# Altium PCB Chicken_Coop_Door_Motor_Control_Board_V2.PcbDoc
Units mm, origin at the board's own origin, x right, y up, seen from the top; angles counter-clockwise.
Board outline 59.87 x 53.07 mm, 2 copper layers (Top Layer, Bottom Layer), stack 1.549 mm thick; 51 components, 35 nets, 157 pads, 47 vias.
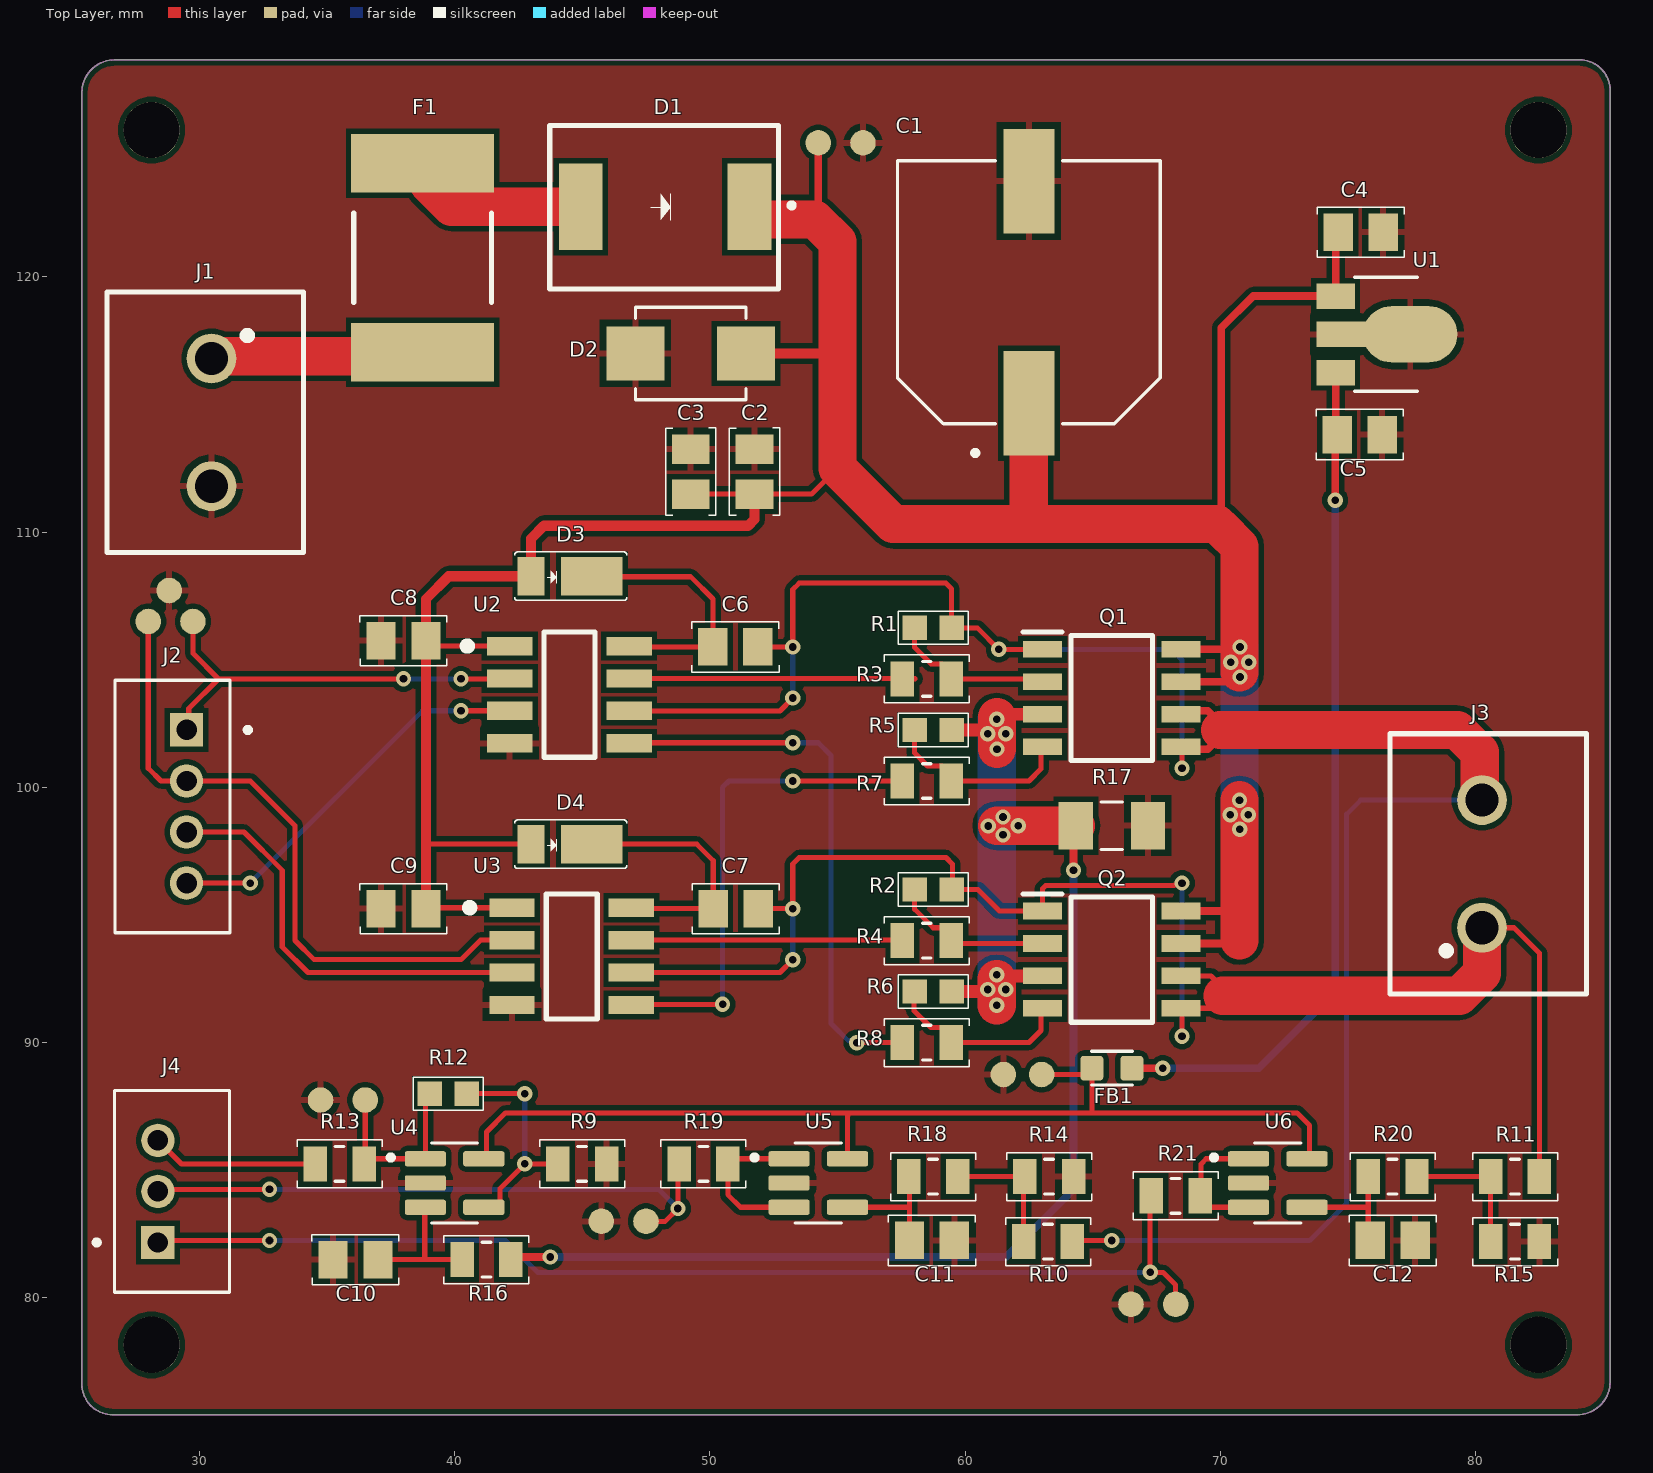
[diagram p0: Top Layer view]
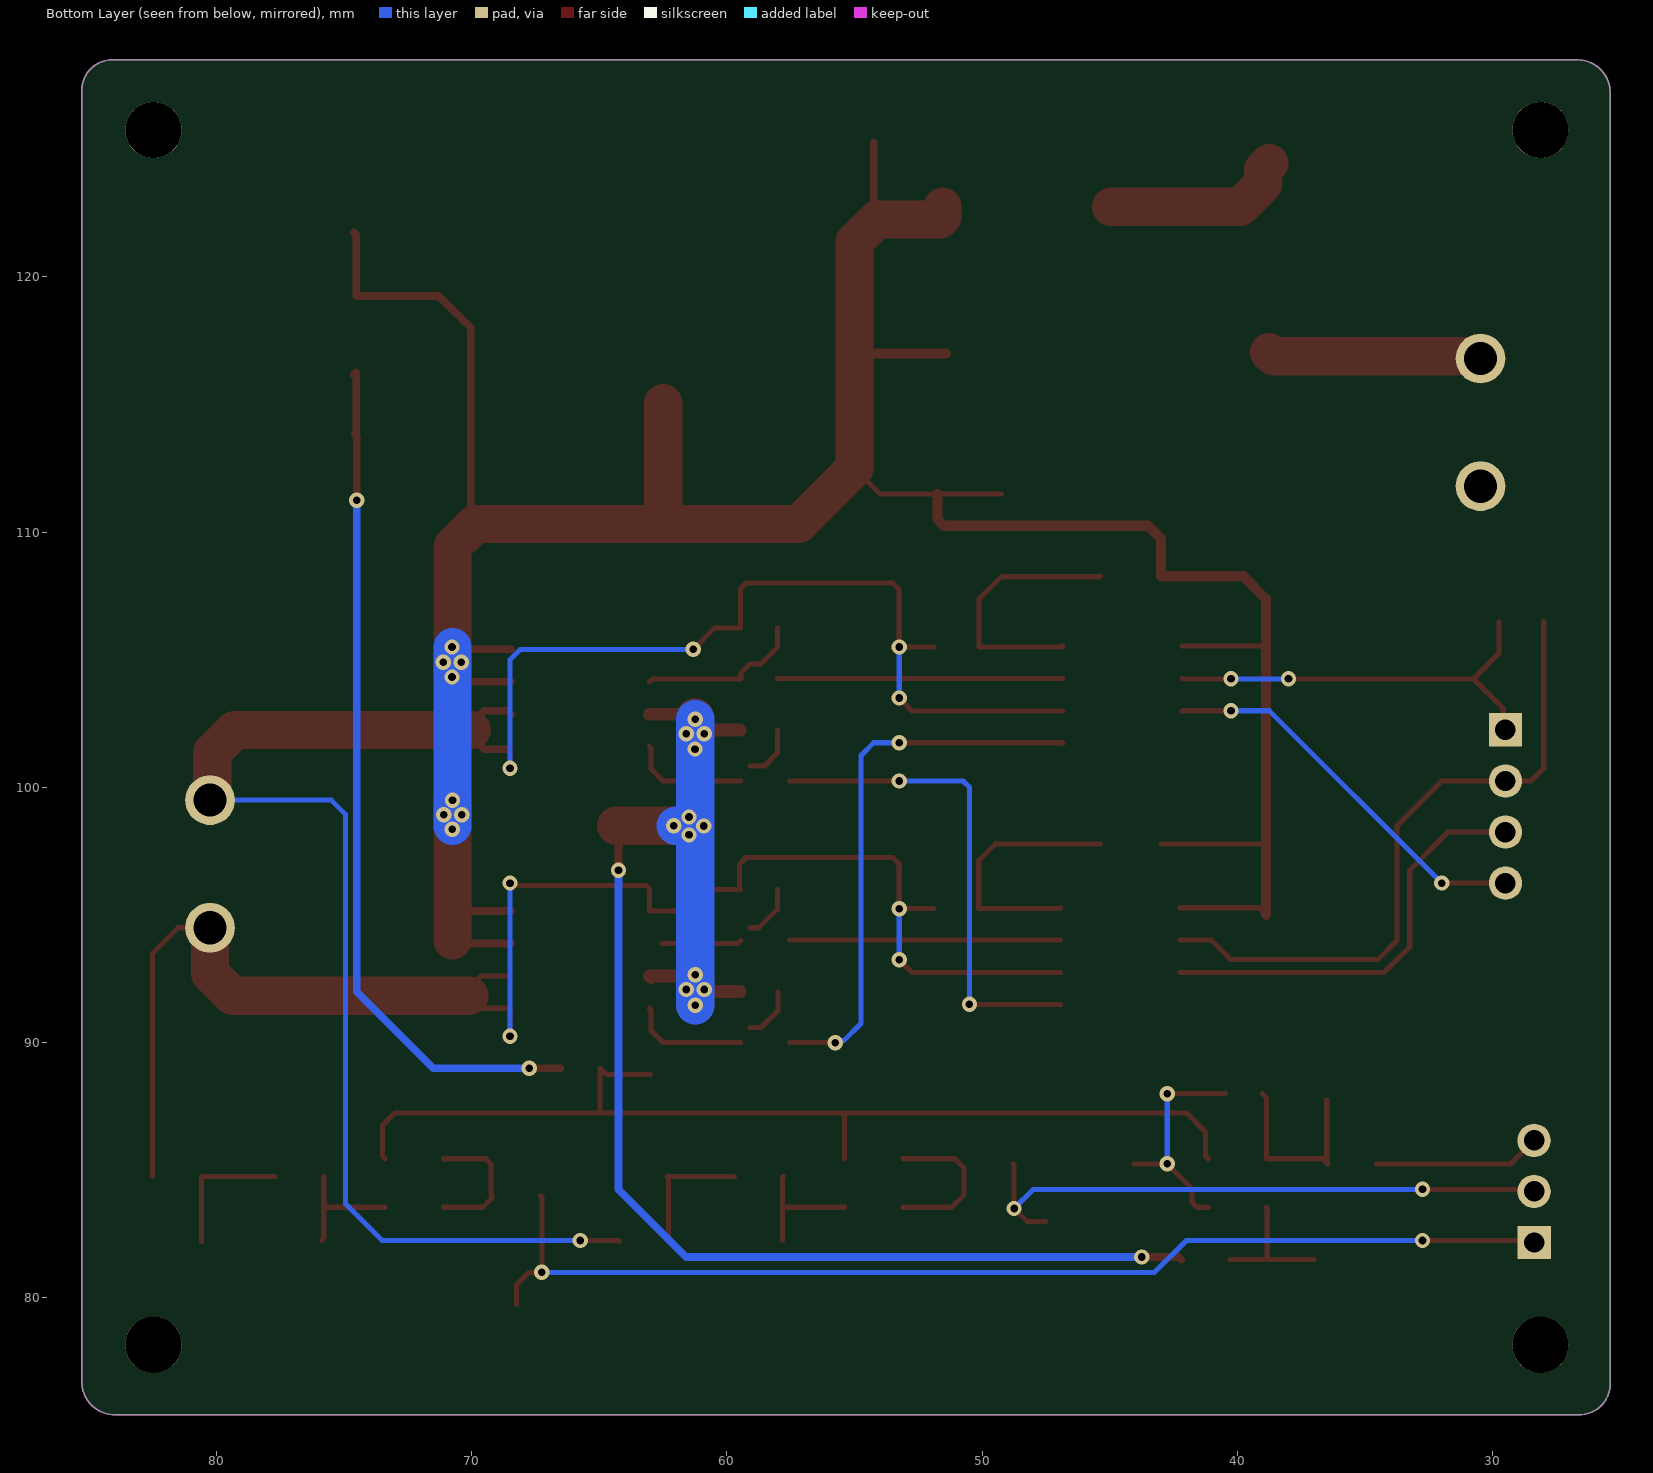
[diagram p1: Bottom Layer view, seen from below]

## Layer stack, top to bottom
Top Solder: solder mask 0.0254, SM-001, Dk 4
Top Layer: signal copper 0.035
Dielectric 1: dielectric 1.4792, FR-4, Dk 4.8
Bottom Layer: signal copper 0.035
Bottom Solder: solder mask 0.0254, SM-001, Dk 4

## Board outline
25.4,76.62 25.4,79.77 25.4,125.8 25.4,127.23 cw(c26.67,127.23) 26.67,128.5 84.08,128.5 cw(c84.08,127.31) 85.27,127.31 85.27,125.8 85.27,79.77 85.27,76.697 cw(c84,76.697) 84,75.427 26.594,75.427 cw(c26.594,76.62)

## Design rules (kind name [scope] priority, off if disabled: settings)
Clearance [All] p1: gap=0.2 ignorepadtopadclearanceinfootprint=FALSE
PolygonConnect [All] p1: connectstyle=Relief reliefconductorwidth=0.254 reliefentries=4 polygonreliefangle="90 Angle" airgapwidth=0.254
RoutingVias [All] p1: holewidth=0.3 width=0.6 viastyle="Through Hole" minholewidth=0.25 minwidth=0.5 maxholewidth=1 maxwidth=2
SolderMaskExpansion [All] p1: expansion=0.102 istentingtop=FALSE
UnRoutedNet [All] p1: checkbadconnections=TRUE
Width [All] p1: maxlimit=5 minlimit=0.1 preferedwidth=0.3 minimp=50.000000 maximp=50.000000 favimp=50.000000
29 further rules are at their usual default settings.

## Classes and differential pairs
component class Power_And_Driver: C1 C2 C3 C4 C5 C6 C7 C8 C9 D1 D2 D3 D4 F1 J1 J2 J3 Q1 Q2 R1 R2 R3 R4 R5 R6 R7 R8 U1 U2 U3
component class Motor_Sensing: C10 C11 C12 FB1 J4 R9 R10 R11 R12 R13 R14 R15 R16 R17 R18 R19 R20 R21 U4 U5 U6

## Components (designator, comment, footprint, x,y, rotation, side; value= is the part's Value field where it differs from the comment)
C1 "330uF" CAP_EEEFK1V331P 62.5,119.4 r90 top
C2 "4.7uF" "CAPC2012X145N 0805" 51.75,112.37 r270 top
C3 "100nF" "CAPC2012X145N 0805" 49.25,112.37 r270 top
C4 "330nF" "CAPC2012X145N 0805" 75.5,121.75 r180 top
C5 "100nF" "CAPC2012X145N 0805" 75.458,113.821 r180 top
C6 "100nF" "CAPC2012X145N 0805" 51,105.5 r180 top
C7 "100nF" "CAPC2012X145N 0805" 51.012,95.25 r180 top
C8 "100nF" "CAPC2012X145N 0805" 38,105.75 r0 top
C9 "100nF" "CAPC2012X145N 0805" 38,95.25 r0 top
C10 "47nF" "CAPC2012X145N 0805" 36.12,81.5 r0 top
C11 "47nF" "CAPC2012X145N 0805" 58.701,82.25 r180 top
C12 "47nF" "CAPC2012X145N 0805" 76.75,82.25 r180 top
D1 "SS33-E3" "SS33-E3/57T Schottky Diode" 48.25,122.75 r0 top
D2 "SMBJ15CA-TR" "TVS DIODE SMBJ15CA-TR" 49.25,117 r0 top
D3 "DFLS240L-7" "DIODE DFLS240L-7  POWERDI 123" 43,108.25 r0 top
D4 "DFLS240L-7" "DIODE DFLS240L-7  POWERDI 123" 43,97.75 r0 top
F1 "FSMD2920" "FUSE FSMD200-24-2920-R" 38.75,120.75 r90 top
FB1 "LCB1608-601Y-N" "MPZ1608S601ATA00 0603 1608X95N" 65.75,89 r180 top
J1 "Header 2x1" "2x1 Terminal Block" 30.48,114.3 r270 top
J2 "Header 4x1" "JST_B4B-PH-K-S 1x4 Header" 28.95,99.25 r90 top
J3 "Header 2x1" "2x1 Terminal Block" 80.25,97 r90 top
J4 "Header 3x1" "JST_B3B-PH-K-S 1x3 Header" 28.929,84.17 r270 top
Q1 "PJL9850" "PJL850 N-CH MOSFET" 65.75,103.5 r0 top
Q2 "PJL9850" "PJL850 N-CH MOSFET" 65.75,93.25 r0 top
R1 "100k" "RES 0603 ROYALOHM" 58.75,106.25 r0 top
R2 "100k" "RES 0603 ROYALOHM" 58.75,96 r0 top
R3 "82R" "RES 0805 YAGEO C2012X60N" 58.5,104.25 r0 top
R4 "82R" "RES 0805 YAGEO C2012X60N" 58.5,94 r0 top
R5 "100k" "RES 0603 ROYALOHM" 58.75,102.25 r0 top
R6 "100k" "RES 0603 ROYALOHM" 58.75,92 r0 top
R7 "1k" "RES 0805 YAGEO C2012X60N" 58.5,100.25 r0 top
R8 "1k" "RES 0805 YAGEO C2012X60N" 58.5,90 r0 top
R9 "3.3k" "RES 0805 YAGEO C2012X60N" 45,85.25 r0 top
R10 "75k" "RES 0805 YAGEO C2012X60N" 63.25,82.207 r0 top
R11 "75k" "RES 0805 YAGEO C2012X60N" 81.545,84.75 r0 top
R12 "330k" "RES 0603 ROYALOHM" 39.75,88 r0 top
R13 "10R" "RES 0805 YAGEO C2012X60N" 35.5,85.25 r180 top
R14 "15k" "RES 0805 YAGEO C2012X60N" 63.295,84.75 r180 top
R15 "15k" "RES 0805 YAGEO C2012X60N" 81.545,82.207 r180 top
R16 "1k" "RES 0805 YAGEO C2012X60N" 41.25,81.5 r180 top
R17 "0.005R" "RES 1206 YAGEO" 65.75,98.5 r180 top
R18 "1k" "RES 0805 YAGEO C2012X60N" 58.75,84.75 r180 top
R19 "10R" "RES 0805 YAGEO C2012X60N" 49.75,85.25 r180 top
R20 "1k" "RES 0805 YAGEO C2012X60N" 76.75,84.75 r180 top
R21 "10R" "RES 0805 YAGEO C2012X60N" 68.25,84 r180 top
U1 "L78L33ABUTR" "LDO L78L33ABUTR SOT89" 76.5,117.75 r270 top
U2 "IR2103STRPBF" "IR2103STRPBF Half Bridge Mosfet Driver" 44.5,103.63 r0 top
U3 "IR2103STRPBF" "IR2103STRPBF Half Bridge Mosfet Driver" 44.59,93.38 r0 top
U4 "MCP6001T-I" "MCP6001T-I/OT OPAMP SOT-23-5" 40,84.5 r0 top
U5 "MCP6001T-I" "MCP6001T-I/OT OPAMP SOT-23-5" 54.25,84.5 r0 top
U6 "MCP6001T-I" "MCP6001T-I/OT OPAMP SOT-23-5" 72.25,84.5 r0 top

## Footprints (in the part's own frame and the unit in brackets; to place one, negate y for a bottom-side part, rotate by r counter-clockwise, add the part's x,y. Pads: shape width x height; smd on the part's side, far side on the other; paste and mask are expansions set on the pad)
"2x1 Terminal Block" [mm]
  round 1.95 hole 1.3: 1(-2.5,0) 2(2.5,0)
  silkscreen extent -5.1,-4.1 5.1,3.6, body extent -4.95,-4 5.05,3.5, height 11.5
CAP_EEEFK1V331P [mm]
  rect 4.1x2 smd: 1(-4.35,0) 2(4.35,0)
  silkscreen extent -6.4,-5.15 5.15,5.15, body extent -5.85,-5.15 5.85,5.15, height 10.3
"CAPC2012X145N 0805" [mm]
  rect 1.15x1.47 smd: 1(-0.88,0) 2(0.88,0)
  silkscreen extent -1.71,-0.98 1.7,0.98, body extent -1,-0.63 1,0.63, height 0.95
"DIODE DFLS240L-7  POWERDI 123" [mm]
  rect 1.05x1.5 smd mask-2539.97: 1(0,0.025)
  rect 2.4x1.5 smd paste-2539.97 mask-2539.97: 2(2.375,0.025)
  silkscreen extent -0.65,-0.93 3.75,0.98, body extent -0.32,-0.86 3.37,0.92, height 1
"FUSE FSMD200-24-2920-R" [mm]
  rect 2.3x5.6 smd: 1(-3.7,0) 2(3.7,0)
  silkscreen extent -1.75,-2.7 1.75,2.7, body extent -3.99,-2.72 3.99,2.72, height 0.8
"IR2103STRPBF Half Bridge Mosfet Driver" [mm] "SOIC,1.27mm pitch;8 pin,3.90mm W X 4.90mm L X 1.75mm H body"
  rect 1.78x0.72 smd paste+0 mask+0: 1(-2.34,1.905) 2(-2.34,0.635) 3(-2.34,-0.635) 4(-2.34,-1.905) 5(2.34,-1.905) 6(2.34,-0.635) 7(2.34,0.635) 8(2.34,1.905)
  silkscreen extent -4.15,-2.45 1,2.45, body extent -3,-2.45 3,2.45, height 1.76
"JST_B3B-PH-K-S 1x3 Header" [mm]
  rect 1.308x1.308 / inner round 1.308 / far side rect 1.308x1.308 hole 0.8: 1(2,-0.55)
  round 1.308 hole 0.8: 2(0,-0.55) 3(-2,-0.55)
  silkscreen extent -3.95,-3.05 3.95,2.25, body extent -3.95,-2.25 3.95,2.25, height 6
"JST_B4B-PH-K-S 1x4 Header" [mm]
  rect 1.308x1.308 / inner round 1.308 / far side rect 1.308x1.308 hole 0.8: 1(3,-0.55)
  round 1.308 hole 0.8: 2(1,-0.55) 3(-1,-0.55) 4(-3,-0.55)
  silkscreen extent -4.95,-3.05 4.95,2.25, body extent -4.95,-2.25 4.95,2.25, height 6
"LDO L78L33ABUTR SOT89" [mm]
  rect 1x1.5 smd paste-2 mask+0: 1(-1.499,-1.981) 3(1.499,-1.981)
  oval 2.2x3.7 smd paste-3: 2(0,0.94)
  rect 1x2 smd paste-2 mask+0: 2(0,-1.727)
  silkscreen extent -2.23,-1.24 2.23,1.22, body extent -2.25,-2.27 2.25,1.83, height 1.6
"MCP6001T-I/OT OPAMP SOT-23-5" [mm]
  rrect25% 1.61x0.59 smd: 1(-1.145,0.95) 2(-1.145,0) 3(-1.145,-0.95) 4(1.145,-0.95) 5(1.145,0.95)
  silkscreen extent -2.6,-1.57 0.9,1.57, body extent -1.35,-1.45 1.35,1.45, height 1.45
"MPZ1608S601ATA00 0603 1608X95N" [mm]
  rrect30% 0.9x0.97 smd: 1(-0.785,0) 2(0.785,0)
  silkscreen extent -0.8,-0.66 0.8,0.66, body extent -0.8,-0.4 0.8,0.4, height 0.95
"PJL850 N-CH MOSFET" [mm]
  rect 1.525x0.65 smd: 1(-2.712,1.905) 2(-2.712,0.635) 3(-2.712,-0.635) 4(-2.712,-1.905) 5(2.712,-1.905) 6(2.712,-0.635) 7(2.712,0.635) 8(2.712,1.905)
  silkscreen extent -3.47,-2.45 1.6,2.58, body extent -3.12,-2.45 2.86,2.45, height 1.74
"RES 0603 ROYALOHM" [mm]
  rect 0.95x0.95 smd: 1(-0.725,0) 2(0.725,0)
  silkscreen extent -1.38,-0.65 1.38,0.65, body extent -0.77,-0.4 0.83,0.4, height 0.45
"RES 0805 YAGEO C2012X60N" [mm]
  rect 0.92x1.38 smd: 1(-0.955,0) 2(0.955,0)
  silkscreen extent -1.67,-0.94 1.67,0.94, body extent -1,-0.63 1,0.63, height 0.6
"RES 1206 YAGEO" [mm]
  rect 1.34x1.86 smd paste+0 mask+0.102: 1(-1.411,0) 2(1.411,0)
  silkscreen extent -0.42,-0.93 0.42,0.93, body extent -1.6,-0.8 1.6,0.8, height 0.89
"SS33-E3/57T Schottky Diode" [mm]
  rect 1.72x3.4 smd: A(-3.305,0) K(3.305,0)
  silkscreen extent -4.52,-3.23 5.05,3.17, body extent -3.97,-2.98 3.97,2.93, height 2.62
"TVS DIODE SMBJ15CA-TR" [mm]
  rect 2.28x2.12 smd paste+0 mask+0.102: 1(-2.165,0) 2(2.165,0)
  silkscreen extent -2.16,-1.81 2.16,1.81, body extent -2.68,-1.94 2.68,1.69, height 2.65

## Part data
C1: library part "CAP Electrolytic EEE-FK1V331P", "330 µF 35 V Aluminum Electrolytic Capacitors Radial, Can - SMD 2000 Hrs @ 105°C", Lifetime @ Temp.="2000 Hrs @ 105°C", Manufacturer="Panasonic Industry", Manufacturer Product Number=EEE-FK1V331P, Operating Temperature="-55°C ~ 105°C", Package / Case="Radial, Can - SMD", Ripple Current @ High Frequency="850 mA @ 100 kHz", Tolerance=±20%, Voltage - Rated="35 V", Capacitance=330uF, ComponentLink1Description="Product Site", ComponentLink1URL=https://www.ozdisan.com/p/aluminyum-kapasitorler-180/panasoniceurope-eeefk1v331p-614518, Impedance="80 mOhms"
C2: library part "CAP 0805 4.7uF CL21B475KOQVPNE", "MLCC (2012) 0805 4.7uF 16VDC ±10% X7R AUTOMOTIVE", Dielectric=X7R, Manufacturer=SAMSUNG, Manufacturer Product Number=CL21B475KOQVPNE, Operating Temp.="-55 °C ~ +125 °C", Package Size=0805, Tolerance="±10 %", Voltage Rating="16 VDC", Capacitance=4.7uF, ComponentLink1Description="Product Site", ComponentLink1URL=https://www.ozdisan.com/p/smt-smd-ve-mlcc-kapasitorler-184/samsung-cl21b475koqvpne-522984
C3 C5 C6 C7 C8 C9: library part "CAP 0805 100nF CC0805JRX7R9BB104", "MLCC 0805 100nF 50VDC ±10% X7R", Dielectric=X7R, Manufacturer=YAGEO, Manufacturer Code=CC0805JRX7R9BB104, Operating Temp.="-55 °C ~ +125 °C", Package Size=0805, Tolerance="±5 %", Voltage Rating=50VDC, Capacitance=100nF, ComponentLink1Description="Product Site", ComponentLink1URL=https://www.ozdisan.com/p/smt-smd-ve-mlcc-kapasitorler-184/yageo-cc0805jrx7r9bb104-748830
C4: library part "CAP 0805 330nF CL21B334KBFNNNE", "MLCC (2012) 0805 330nF 50VDC ±10% X7R", Dielectric=X7R, Manufacturer=SAMSUNG, Manufacturer Product Number=CL21B334KBFNNNE, Operating Temp.="-55 °C ~ +125 °C", Package Size=0805, Tolerance="±10 %", Voltage Rating="50 VDC", Capacitance=330nF, ComponentLink1Description="Product Site", ComponentLink1URL=https://www.ozdisan.com/p/smt-smd-ve-mlcc-kapasitorler-184/samsung-cl21b334kbfnnne-40669
C10 C11 C12: library part "CAP 0805 47nF CL21B473KBCNNNC", "CL21B473KBCNNNC", Dielectric=X7R, Manufacturer=SAMSUNG, Operating Temp.="-55 °C ~ +125 °C", Package Size=0805, Tolerance="±10 %", Voltage Rating="50 VDC", Capacitance=47nF, ComponentLink1Description="Product Site", ComponentLink1URL=https://www.ozdisan.com/p/smt-smd-ve-mlcc-kapasitorler-184/samsung-cl21b473kbcnnnc-10433, Manufacturer Product Number=CL21B473KBCNNNC
D1: library part "DIODE SCHOTTKY SS33-E3/57T", "DIODE SCHOTTKY 30V 3A DO214AB", Current - Average Rectified (Io)=3A, Current - Reverse Leakage @ Vr="500 µA @ 30 V", Manufacturer="Vishay General Semiconductor - Diodes Division", Manufacturer Product Number=SS33-E3/57T, Operating Temperature - Junction="-55°C ~ 125°C", Package / Case="DO-214AB, SMC", Voltage - DC Reverse (Vr) (Max)="30 V", Voltage - Forward (Vf) (Max) @ If="500 mV @ 3 A", ComponentLink1Description="Product Site", ComponentLink1URL=https://www.ozdisan.com/p/schottky-diyotlar-385/vishay-ss33-e3-57t-366018
D2: library part "TVS DIODE SMBJ15CA-TR", "24.4V Clamp 25.1A Ipp Tvs Diode Surface Mount SMB", Current - Peak Pulse (10/1000µs)=25.1A, Manufacturer=STMicroelectronics, Operating Temperature="-55°C ~ 150°C (TJ)", Package / Case="DO-214AA, SMB", Power - Peak Pulse=600W, Voltage - Breakdown (Min)=16.7V, Voltage - Clamping (Max) @ Ipp=24.4V, Voltage - Reverse Standoff (Typ)=15V, ComponentLink1Description="Product Site", ComponentLink1URL=https://www.ozdisan.com/p/tvs-diyotlar-386/stm-smbj15ca-tr-653151, Manufacturer Product Number=SMBJ15CA-TR, Type=Zener
D3 D4: library part "DIODE SCHOTTKY DFLS240L-7", "DIODE SCHOTTK 40V 2A POWERDI 123", Capacitance @ Vr, F="90pF @ 10V, 1MHz", Current - Average Rectified (Io)=2A, Current - Reverse Leakage @ Vr="100 µA @ 40 V", Manufacturer="Diodes Incorporated", Package / Case=POWERDI®123, Voltage - DC Reverse="40 V", Voltage - Forward (Vf) (Max) @ If="500 mV @ 2 A", ComponentLink1Description="Product Site", ComponentLink1URL=https://www.ozdisan.com/p/schottky-diyotlar-385/diodes-dfls240l-7-434954, Manufacturer Product Number=DFLS240L-7
F1: library part "FUSE FSMD200-24-2920-R", "PTC Resettable Fuse 24V 2 A Ih Surface Mount 2920 (7351 Metric), Concave", Current - Hold (Ih) (Max)="2 A", Current - Max="100 A", Current - Trip (It)="4 A", Manufacturer=RFE/Fuzetec, Manufacturer Product Number=FSMD200-24-2920-R, Operating Temperature="-40°C ~ 85°C", Package / Case="2920 (7351 Metric)", Resistance - Post Trip (R1) (Max)="120 mOhms", Voltage - Max=24V, ComponentLink1Description="Product Site", ComponentLink1URL=https://www.ozdisan.com/p/ptc-sigortalar-845/fuzetec-fsmd200-24-2920-r-537039, Time to Trip="5 s"
FB1: library part "Ferrite Bead LCB1608-601Y-N", "600 Ohms @ 100 MHz 1 Power Line Ferrite Bead 0603 (1608 Metric) 1A 200mOhm", Current="1 A", Manufacturer="CORE MASTER", Package Size=0603, Tolerance="±25 %", ComponentLink1Description="Product Site", ComponentLink1URL=http://ozdisan.com/p/bead-feritler-469/core-master-lcb1608-601y-n-496992, DCR="200 m Ohms", Manufacturer Code=LCB1608-601Y-N, Impedance="600 Ohms"
J1 J3: library part "Terminal Block 2x1", "TERM.BLK.5.00MM 2P PCB TYPE GREEN", Current=16A, Manufacturer=DEGSON, Manufacturer Product Number=DG130-5.0-02P-14-00AH, Operating Temperature="-30°C ~ 120°C", Voltage=300V, ComponentLink1Description="Product Site", ComponentLink1URL=https://www.ozdisan.com/p/pcb-klemensler-410/degson-dg130-5-0-02p-14-00ah-740967, Mounting Type=THT, Pitch="0.197\" (5.00mm)"
J2: library part "Header 4x1 DS1066-4MVW6X", "CON.T.B.2MM 4P 180C MALE WHITE CONNFLY", Manufacturer=CONNFLY, Manufacturer Product Number=DS1066-4MVW6X, ComponentLink1Description="Product Site", ComponentLink1URL=https://www.ozdisan.com/p/pcb-konnektorler-310/connfly-ds1066-4mvw6x-357972, Contact Type="Male Pin", Mounting Type="Through Hole", Pitch - Mating="0.079\" (2.00mm)", Series=PH
J4: library part "Header 3x1 DS1066-3MVW6X", "CON.T.B.2.00MM 3P 180C MALE CONNFLY", Manufacturer=CONNFLY, Manufacturer Product Number=DS1066-3MVW6X, ComponentLink1Description="Product Site", ComponentLink1URL=https://www.ozdisan.com/p/pcb-konnektorler-310/connfly-ds1066-3mvw6x-493781, Contact Type="Male Pin", Mounting Type="Through Hole", Pitch - Mating="0.079\" (2.00mm)", Series=PH
Q1 Q2: library part "PJL9850 N-Ch MOSFET", "Low Voltage MOSFET (20-40V,Rds(on)<1) - PJL9850 , N/N Channel, Dual, 5.4A, 40V, SOP-8", Current - Continuous Drain (Id) @ 25°C="5.4A (Ta)", Drain to Source Voltage (Vdss)=40V, Manufacturer=PANJIT, Manufacturer Product Number=PJL9850_R2_00001, Operating Temperature="-55°C ~ 150°C (TJ)", Package / Case=SOP8, ComponentLink1Description="Product Site", ComponentLink1URL=https://www.ozdisan.com/p/discrete-mosfetler-435/panjit-pjl9850-r2-00001-601739, Configuration="2 N-Channel (Dual)", Datasheet Link=https://www.panjit.com.tw/en/Product/downloadPDF/PJL9850, Gate Charge (Qg) (Max) @ Vgs="4.4nC @ 4.5V", Geometry.Height=1.75mm, Rds On (Max) @ Id, Vgs="32mOhm @ 5A, 10V"
R1 R2 R5 R6: library part "RES 0603 100k 0603SAF1003T5E", "RES.(1608) 0603 100K Ohms 1% 1/10W-S 100PPM", Manufacturer=ROYALOHM, Manufacturer Product Number=0603SAF1003T5E, Operating Temperature="-55°C ~ 155°C", Package / Case="0603 (1608 Metric)", Power (Watts)="0.1W, 1/10W", Resistance="100 kOhms", Tolerance="±5 %", ComponentLink1Description="Product Site", ComponentLink1URL=https://www.ozdisan.com/p/smt-smd-ve-cip-direncler-194/royalohm-0603saf1003t5e-339374
R3 R4: library part "RES 0805 82 Ohms 0805S8J0820T5E", "RES.(2012) 0805 82 Ohms 5% 1/8W-S 200PPM", Manufacturer=ROYALOHM, Manufacturer Code=0805S8J0820T5E, Max Working Current=5A, Max Working Voltage=150, Package / Case=0805, Power=1/8W, Resistance="82 Ohms", Tolerance="±1 %", ComponentLink1Description="Product Site", ComponentLink1URL=https://www.ozdisan.com/p/smt-smd-ve-cip-direncler-194/royalohm-0805s8j0820t5e-341837
R7 R8 R16 R18 R20: library part "RES 0805 1k Ohms 0805S8F1001TDE", "RES.(2012) 0805 1K Ohms 1% 1/8W-S 100PPM", Manufacturer=ROYALOHM, Manufacturer Code=0805S8F1001TDE, Max Working Current=5A, Max Working Voltage=150VDC, Package / Case=0805, Power=1/8W, Resistance="1k Ohms", Tolerance="±1 %", ComponentLink1Description="Product Site", ComponentLink1URL=https://www.ozdisan.com/p/smt-smd-ve-cip-direncler-194/royalohm-0805s8f1001tde-356631
R9: library part "RES 0805 3.3k Ohms 0805S8F3301TDE", "RES.(2012) 0805 3.3K Ohms 1% 1/8W-S 100PPM", Manufacturer=ROYALOHM, Manufacturer Code=0805S8F3301TDE, Max Working Current=5A, Max Working Voltage=150VDC, Package / Case=0805, Power=1/8W, Resistance="3.3k Ohms", Tolerance="±1 %", ComponentLink1Description="Product Site", ComponentLink1URL=https://www.ozdisan.com/p/smt-smd-ve-cip-direncler-194/royalohm-0805s8f3301tde-502827
R10 R11: library part "RES 0805 75 kOhms 0805S8F7502T5E", "RES.(2012) 0805 75K Ohms 1% 1/8W-S 100PPM", Manufacturer=ROYALOHM, Manufacturer Code=0805S8F7502T5E, Max Working Current=5A, Max Working Voltage=150VDC, Package / Case=0805, Power=1/8W, Resistance="75 kOhms", Tolerance="±1 %", ComponentLink1Description="Product Site", ComponentLink1URL=https://www.ozdisan.com/p/smt-smd-ve-cip-direncler-194/royalohm-tc0525d1502t5g-569982
R12: library part "RES 0603 330k 0603SAF3303T5E", "RES.(1608) 0603 330K Ohms 1% 1/10W-S 100PPM", Manufacturer=ROYALOHM, Manufacturer Product Number=0603SAF3303T5E, Operating Temperature="-55°C ~ 155°C", Package / Case="0603 (1608 Metric)", Power (Watts)="0.1W, 1/10W", Resistance="330 kOhms", Tolerance="±5 %", ComponentLink1Description="Product Site", ComponentLink1URL=https://www.ozdisan.com/p/smt-smd-ve-cip-direncler-194/royalohm-0603saf3303t5e-358867
R13 R19 R21: library part "RES 0805 10 Ohms 0805S8J0100T5E", "RES.(2012) 0805 10 Ohms 5% 1/8W-S 400PPM", Manufacturer=ROYALOHM, Manufacturer Code=0805S8J0100T5E, Max Working Current=5A, Max Working Voltage=150VDC, Package / Case=0805, Power=1/8W, Resistance="10 Ohms", Tolerance="±1 %", ComponentLink1Description="Product Site", ComponentLink1URL=https://www.ozdisan.com/p/smt-smd-ve-cip-direncler-194/royalohm-0805s8j0100t5e-29704
R14 R15: library part "RES 0805 15 kOhms TC0525D1502T5G", "RES.(2012) 0805 15K Ohms 0.5% 1/8W 25PPM", Manufacturer=ROYALOHM, Manufacturer Code=TC0525D1502T5G, Max Working Current=5A, Max Working Voltage=150VDC, Package / Case=0805, Power=1/8W, Resistance="15 kOhms", Tolerance="±1 %", ComponentLink1Description="Product Site", ComponentLink1URL=https://www.ozdisan.com/p/smt-smd-ve-cip-direncler-194/royalohm-tc0525d1502t5g-569982
R17: library part "RES 1206 5 mOhms PE1206FRF070R005L", "RES.(3216) 1206 5m Ohms 1% 1/4W 100PPM AEC-Q200 SM", Manufacturer=YAGEO, Manufacturer Code=PE1206FRF070R005L, Max Working Current=5A, Max Working Voltage=150, Package / Case=0805, Power=1/4W, Resistance="5 mOhms", Tolerance="±1 %", ComponentLink1Description="Product Site", ComponentLink1URL=https://www.ozdisan.com/p/smt-smd-ve-cip-direncler-194/yageo-pe1206frf070r005l-854695
U1: library part "LDO L78L33ABUTR", "Linear Voltage Regulator IC Positive Fixed 1 Output 100mA SOT-89-3", Current - Output=100mA, Current - Quiescent (Iq)="5.5 mA", Current - Supply (Max)="6 mA", Manufacturer=STMicroelectronics, Voltage - Output (Min/Fixed)=3.3V, Voltage - Input (Max)=30V, ComponentLink1Description="Product Site", ComponentLink1URL=https://www.ozdisan.com/p/lineer-voltaj-regulatorleri-279/stm-l78l33abutr-350187, Manufacturer Product Number=L78L33ABUTR, Output Type=Fixed
U2 U3: library part "IR2103STRPBF Half Bridge MOSFET Driver", "Half-Bridge Gate Driver IC Inverting, Non-Inverting 8-SOIC", Current - Peak Output (Source, Sink)="210mA, 360mA", High Side Voltage - Max (Bootstrap)="600 V", Logic Voltage - VIL, VIH="0.8V, 3V", Manufacturer="Infineon Technologies", Package / Case=8-SOIC, Voltage - Supply="10V ~ 20V", ComponentLink1Description="Product Site", ComponentLink1URL=https://www.ozdisan.com/p/guc-surucu-entegreleri-270/ir-ir2103strpbf-468696, Driven Configuration=Half-Bridge, Gate Type="IGBT, MOSFET (N-Channel)", Manufacturer Product Number=IR2103STRPBF, Number of Drivers=2, Rise / Fall Time (Typ)="100ns, 50ns"
U4 U5 U6: library part "MCP6001T-I/OT OP-AMP 1 CH LOW POWER", "Standard (General Purpose) Amplifier 1 Circuit Rail-to-Rail SOT-23-5", Current - Output / Channel="23 mA", Current - Supply=100µA, Manufacturer="Microchip Technology", Manufacturer Product Number=MCP6001T-I/OT, Operating Temperature="-40°C ~ 85°C", Package / Case=SOT-23-5, Voltage - Supply Span (Min) - (Max)="1.8V to 6V", Voltage - Input Offset="4.5 mV", ComponentLink1Description="Product Site", ComponentLink1URL=https://www.ozdisan.com/p/amplifikatorler-242/microchip-mcp6001t-i-ot-40820, Gain Bandwidth Product="1 MHz", Output Type=Rail-to-Rail

## Free pads (board coordinates)
  round 2.2 hole 2.2 unplated: 1(28.131,125.75) 2(82.466,125.75) 3(28.131,78.161) 4(82.466,78.161)
  round 1 smd: 2(54.25,125.25) 3(56,125.25) 4(63,88.75) 5(61.5,88.75) 6(47.5,83) 7(45.75,83) 8(68.25,79.75) 9(66.5,79.75) 10(36.5,87.75) 11(34.75,87.75) 12(29.75,106.5) 13(28,106.5) 14(28.822,107.711)

## Via types
v1: diameter 0.6, hole 0.3, Top Layer to Bottom Layer, tented both sides, 47 vias

## Nets (pads, with @x,y where several pads share a name; then routed paths per layer and width w, separated by ;. In a path a pad name is that pad's centre, name@x,y a point inside that pad or via, vN(x,y) a via of type N, cw(c..) or ccw(c..) an arc to the next point about the centre after c; other vN are vias at no path point)
+3V3: C5.2 FB1.1 U1.3 | length 33.6
  Top Layer w0.3: FB1.1 v1(67.75,89) ; v1(74.5,111.25) 74.5,113.743 C5.2 ; C5.2@74.519,113.899 U1.3 U1.3@74.62,116.15
  Bottom Layer w0.3: v1(67.75,89) 71.5,89 74.5,92 v1(74.5,111.25)
+Vin: F1.1 J1.1 | length 8.4
  Top Layer w1.5: J1.1 30.566,116.886 38.586,116.886 F1.1
+Vp: C1.1 C2.2 C3.2 C4.2 C8.2 C9.2 D1.K D2.2 D3.1 D4.1 pad.2@54.25,125.25 Q1.7 Q1.8 Q2.7 Q2.8 U1.1 U2.1 U3.1 | length 129.3
  Top Layer w0.2: C9.2@38.88,95 39.165,95.285 U3.1 ; 38.905,97.775 D4.1 ; C8.2@39,105.62 39.085,105.535 U2.1 ; C3.2 C2.2 53.99,111.49 55,112.5
  Top Layer w0.3: 54.121,122.25 54.25,122.379 pad.2@54.25,125.25 ; Q2.7 70.635,93.885 70.75,94 ; Q2.8 70.595,95.155 70.75,95 ; Q1.7 70.385,104.135 v1@70.75,104.5 ; Q1.8 70.655,105.405 v1@70.75,105.5 ; 70.036,110.149 70.036,118 71.285,119.249 U1.1 74.519,121.649 C4.2
  Top Layer w0.4: C9.2@38.88,95 C9.2 38.88,97.75 ; 38.905,97.775 38.88,97.75 ; D2.2 54.75,117 55,116.75 ; C2.2 51.75,110.5 51.5,110.25 43.5,110.25 43,109.75 D3.1 39.775,108.275 38.88,107.38 C8.2 38.88,97.75
  Top Layer w1.5: D1.K 51.555,122.36 51.665,122.25 54.121,122.25 55,121.371 55,116.75 55,112.5 57.186,110.314 62.5,110.314 ; C1.1 62.5,110.314 ; 70.75,94 70.75,95 v1(70.75,99.5) ; v1@70.75,104.5 70.75,105.5 70.75,109.436 70.036,110.149 69.871,110.314 62.5,110.314
  Bottom Layer w1.5: v1@70.75,98.5 v1(70.75,99.5) v1@70.75,105.5
  other v1: 70.757,98.354 70.393,98.929 71.096,98.929 70.768,104.322 70.404,104.897 71.107,104.897 70.768,105.5
BWD_HS_GATE: R4.1 U3.7 | length 10.6
  Top Layer w0.2: U3.7 R4.1@57.545,94.015
BWD_LS_GATE: R8.1 U2.5 | length 21.7
  Top Layer w0.2: U2.5 46.865,101.75 v1(53.25,101.75) ; v1(55.75,90) R8.1
  Bottom Layer w0.2: v1(53.25,101.75) 54.25,101.75 54.75,101.25 54.75,90.75 55.423,90.077 55.673,90.077 v1(55.75,90)
FWD_HS_GATE: R3.1 U2.7 | length 11.2
  Top Layer w0.2: U2.7 58.03,104.265 58.045,104.25
FWD_LS_GATE: R7.1 U3.5 | length 19.2
  Top Layer w0.2: U3.5 46.955,91.5 v1(50.5,91.5) ; v1(53.25,100.25) R7.1
  Bottom Layer w0.2: v1(50.5,91.5) 50.5,100 50.75,100.25 v1(53.25,100.25)
GND: C1.2 C2.1 C3.1 C4.1 C5.1 C8.1 C9.1 C10.1 C11.1 C12.1 D2.1 J1.2 pad.3@56,125.25 pad.5 pad.7 pad.9 pad.11 pad.14 R9.2 R14.1 R15.1 R17.1 U1.2 U2.4 U3.4 U4.2 U5.2 U6.2
HB_A_SWITCH: C6.1 J3.2 Q1.1 Q1.5 Q1.6 R1.2 R10.2 U2.6 | length 85
  Top Layer w0.2: U2.6 52.745,102.995 v1(53.25,103.5) ; C6.1 v1(53.25,105.5) 53.25,107.75 53.5,108 59.25,108 59.475,107.775 R1.2 60.475,106.25 v1(61.32,105.405) Q1.1 ; R10.2 64.248,82.25 v1(65.75,82.25) ; v1(68.5,100.75) 68.5,101.443 Q1.5@68.557,101.5
  Top Layer w0.3: Q1.6 68.597,103 69.5,103 70,102.5 70,102.25 70,102 69.5,101.5 Q1.5@68.557,101.5
  Top Layer w1.5: 70,102.25 79.285,102.25 80.164,101.371 80.164,99.586 J3.2
  Bottom Layer w0.2: v1(53.25,103.5) v1(53.25,105.5) ; v1(61.32,105.405) 68.095,105.405 68.5,105 v1(68.5,100.75) ; v1(65.75,82.25) 73.5,82.25 74.95,83.7 74.95,98.95 75.5,99.5 J3.2
HB_B_SWITCH: C7.1 J3.1 Q2.1 Q2.5 Q2.6 R2.2 R11.2 U3.6 | length 64.1
  Top Layer w0.2: U3.6 52.745,92.745 v1(53.25,93.25) ; C7.1 v1(53.25,95.25) 53.25,97 53.5,97.25 59.25,97.25 59.5,97 59.5,96.025 R2.2 60.5,96 61.345,95.155 Q2.1 63.038,96.033 63.155,96.15 68.183,96.15 68.206,96.173 68.423,96.173 v1(68.5,96.25) ; Q2.6 69.635,92.615 69.884,92.366 69.884,91.634 69.595,91.345 Q2.5 68.5,91.307 v1(68.5,90.25) ; J3.1 81.5,94.5 82.5,93.5 R11.2
  Top Layer w1.5: 70.086,91.836 79.371,91.836 80.25,92.715 J3.1
  Bottom Layer w0.2: v1(53.25,93.25) v1(53.25,95.25) ; v1(68.5,90.25) v1(68.5,96.25)
MOTOR_CURRENT: J4.3 R13.2 | length 6.5
  Top Layer w0.2: J4.3 29.3,85.25 R13.2
Motor_INA: J2.4 U2.3 | length 15.5
  Top Layer w0.2: J2.4 v1(32,96.25) ; v1(40.25,103) 42.155,103 U2.3
  Bottom Layer w0.2: v1(32,96.25) 38.75,103 v1(40.25,103)
Motor_INB: J2.3 U3.3 | length 16.8
  Top Layer w0.2: J2.3 31.75,98.25 33.25,96.75 33.25,93.75 34.255,92.745 U3.3
Motor_PWM_A: J2.1 pad.12 U2.2 | length 16.6
  Top Layer w0.2: J2.1 29.587,102.337 29.587,103.087 30.75,104.25 ; pad.12 29.75,105.25 30.75,104.25 ; v1(38,104.25) 30.75,104.25 ; v1(40.25,104.25) 42.145,104.25 U2.2
  Bottom Layer w0.2: v1(38,104.25) v1(40.25,104.25)
Motor_PWM_B: J2.2 pad.13 U3.2 | length 26.1
  Top Layer w0.2: pad.13 28,100.75 28.5,100.25 J2.2 32,100.25 33.75,98.5 33.75,94 34.5,93.25 40.25,93.25 41.015,94.015 U3.2
MOTOR_VREF_A: J4.2 pad.6 R19.2 | length 23.9
  Top Layer w0.2: J4.2@28.5,84.5 28.75,84.25 v1(32.75,84.25) ; pad.6 48.25,83 v1(48.75,83.5) 48.75,85.205 R19.2
  Bottom Layer w0.2: v1(32.75,84.25) 48,84.25 v1(48.75,83.5)
MOTOR_VREF_B: J4.1 pad.8 R21.2 | length 44.4
  Top Layer w0.2: J4.1 28.459,82.25 v1(32.75,82.25) ; R21.2 67.25,83.955 v1(67.25,81) 67.75,81 68.25,80.5 pad.8
  Bottom Layer w0.2: v1(32.75,82.25) 42,82.25 43.25,81 v1(67.25,81)
MOTOR_VSENSE_A: R10.1 R14.2 R18.1 | length 5.2
  Top Layer w0.2: R18.1 R14.2 62.295,84.705 R10.1
MOTOR_VSENSE_B: R11.1 R15.2 R20.1 | length 5.4
  Top Layer w0.2: R20.1 R11.1 R15.2
NetC6_2: C6.2 D3.2 U2.8 | length 10.3
  Top Layer w0.2: D3.2 45.4,108.25 49.25,108.25 50.12,107.38 C6.2 46.875,105.5 U2.8
NetC7_2: C7.2 D4.2 U3.8 | length 10.1
  Top Layer w0.2: D4.2 49.487,97.775 50.132,97.13 C7.2 46.965,95.25 U3.8
NetC10_2: C10.2 R16.2 U4.3 | length 5.4
  Top Layer w0.2: C10.2 38.831,81.5 ; U4.3 38.831,83.526 38.831,81.5 ; R16.2 38.831,81.5
NetC11_2: C11.2 R18.2 U5.4 | length 5
  Top Layer w0.2: U5.4 57.758,83.55 57.821,83.487 ; R18.2 57.821,84.724 57.821,83.487 ; C11.2 57.821,83.487
NetC12_2: C12.2 R20.2 U6.4 | length 4.9
  Top Layer w0.2: U6.4 75.783,83.55 75.795,83.538 ; R20.2 75.795,83.538 ; C12.2 75.795,82.325 75.795,83.538
NetD1_A: D1.A F1.2 | length 7.2
  Top Layer w1.5: F1.2 39,124.2 39,123.629 39.879,122.75 D1.A
NetQ1_2: Q1.2 R1.1 R3.2 | length 6.5
  Top Layer w0.2: R1.1 58.025,105.475 58.66,104.84 59.095,104.84 59.455,104.48 R3.2 62.923,104.25 Q1.2
NetQ1_4: Q1.4 R5.1 R7.2 | length 6.8
  Top Layer w0.2: R5.1 58.025,101.344 58.529,100.84 R7.2@59.095,100.84 ; R7.2 62.5,100.25 62.975,100.725 62.975,101.532 Q1.4
NetQ2_2: Q2.2 R2.1 R4.2 | length 5.3
  Top Layer w0.2: R2.1 58.025,95.225 58.75,94.5 R4.2@59.095,94.5 ; R4.2 59.57,93.885 Q2.2@62.538,93.885
NetQ2_4: Q2.4 R6.1 R8.2 | length 6.7
  Top Layer w0.2: R6.1@58,91.975 58,91.25 58.66,90.59 R8.2@59.095,90.59 ; R8.2 62.5,90 62.977,90.477 62.977,91.284 Q2.4
NetR9_1: R9.1 R12.2 U4.4 | length 8.9
  Top Layer w0.2: R12.2 v1(42.75,88) ; U4.4 41.581,83.55 41.776,83.745 41.776,84.276 v1(42.75,85.25) R9.1
  Bottom Layer w0.2: v1(42.75,85.25) v1(42.75,88)
NetR12_1: pad.10 R12.1 R13.1 U4.1 | length 7.6
  Top Layer w0.2: R13.1 R13.1@36.5,85.295 ; pad.10 R13.1@36.5,85.295 ; R12.1 38.855,87.83 U4.1 36.655,85.45 R13.1@36.5,85.295
NetR19_1: R19.1 U5.1 U5.3 | length 6.2
  Top Layer w0.2: U5.3 51.2,83.55 50.705,84.045 50.705,85 50.705,85.09 51.065,85.45 U5.1
NetR21_1: R21.1 U6.1 U6.3 | length 5.3
  Top Layer w0.2: U6.3 69.565,83.55 69.205,83.91 R21.1 69.25,84.045 69.25,85.25 69.45,85.45 U6.1
Q1/Q2_SOURCE: Q1.3 Q2.3 R5.2 R6.2 R16.1 R17.2 | length 62.6
  Top Layer w0.2: Q1.3@63.017,102.844 Q1.3
  Top Layer w0.3: R16.1 42.305,81.6 v1(43.75,81.6) ; v1(64.25,96.75) 64.25,98.411 R17.2
  Top Layer w0.5: R6.2 60.7,92 61.238,91.462 v1(61.242,91.462) ; R5.2 60.75,102.25 61.25,102.75 61.365,102.865 Q1.3 ; v1@61.242,92.492 61.365,92.615 Q2.3 Q2.3@62.963,92.54
  Top Layer w1.5: v1(61.242,91.462) v1@61.242,92.492 ; 61.25,98.5 R17.2 ; v1(61.25,101.5) v1@61.25,102.75
  Bottom Layer w0.3: v1(43.75,81.6) 61.6,81.6 64.25,84.25 v1(64.25,96.75)
  Bottom Layer w1.5: v1(61.242,91.462) v1(61.242,92.658) 61.242,98.5 ; v1@61.242,102.67 61.242,98.5 ; v1@62,98.5 61.242,98.5
  other v1: 60.892,92.083 61.595,92.083 61.488,98.138 60.913,98.487 62.083,98.498 61.488,98.84 60.889,102.095 61.592,102.095 61.239,102.67
VCC: FB1.2 pad.4@63,88.75 U4.5 U5.5 U6.5 | length 40.9
  Top Layer w0.2: U4.5 41.25,85.555 41.25,86.5 42,87.25 55.5,87.25 ; U5.5 55.395,87.145 55.5,87.25 ; pad.4@63,88.75 64.715,88.75 FB1.2 64.965,87.285 65,87.25 ; U6.5 73.5,85.555 73.5,86.75 73,87.25 55.5,87.25

## Polygon pours and split planes (outlines as drawn)
GND on Top Layer "GND_L01_P000" (solid, remove dead copper, pour order 0): 25.4,129.5 86,129 85.75,78.25 85.727,73.481 83.845,73.481 24.613,73.99

## Keep-outs
Keep-Out Layer:
  lines w0.05: 25.4,76.62 ccw(c26.594,76.62) 26.594,75.427 83.924,75.427 84,75.427 ccw(c84,76.697) 85.27,76.697 85.27,79.77 85.27,125.8 85.27,127.31 ccw(c84.08,127.31) 84.08,128.5 26.75,128.5 26.67,128.5 ccw(c26.67,127.23) 25.4,127.23 25.4,125.8 25.4,79.77 25.4,76.62